# Altium PCB SnapItRev1.PcbDoc
Units mm, origin at the board's own origin, x right, y up, seen from the top; angles counter-clockwise.
Board outline 125 x 55.1 mm, 2 copper layers (Top Layer, Bottom Layer); 20 components, 47 nets, 115 pads, 11 vias.
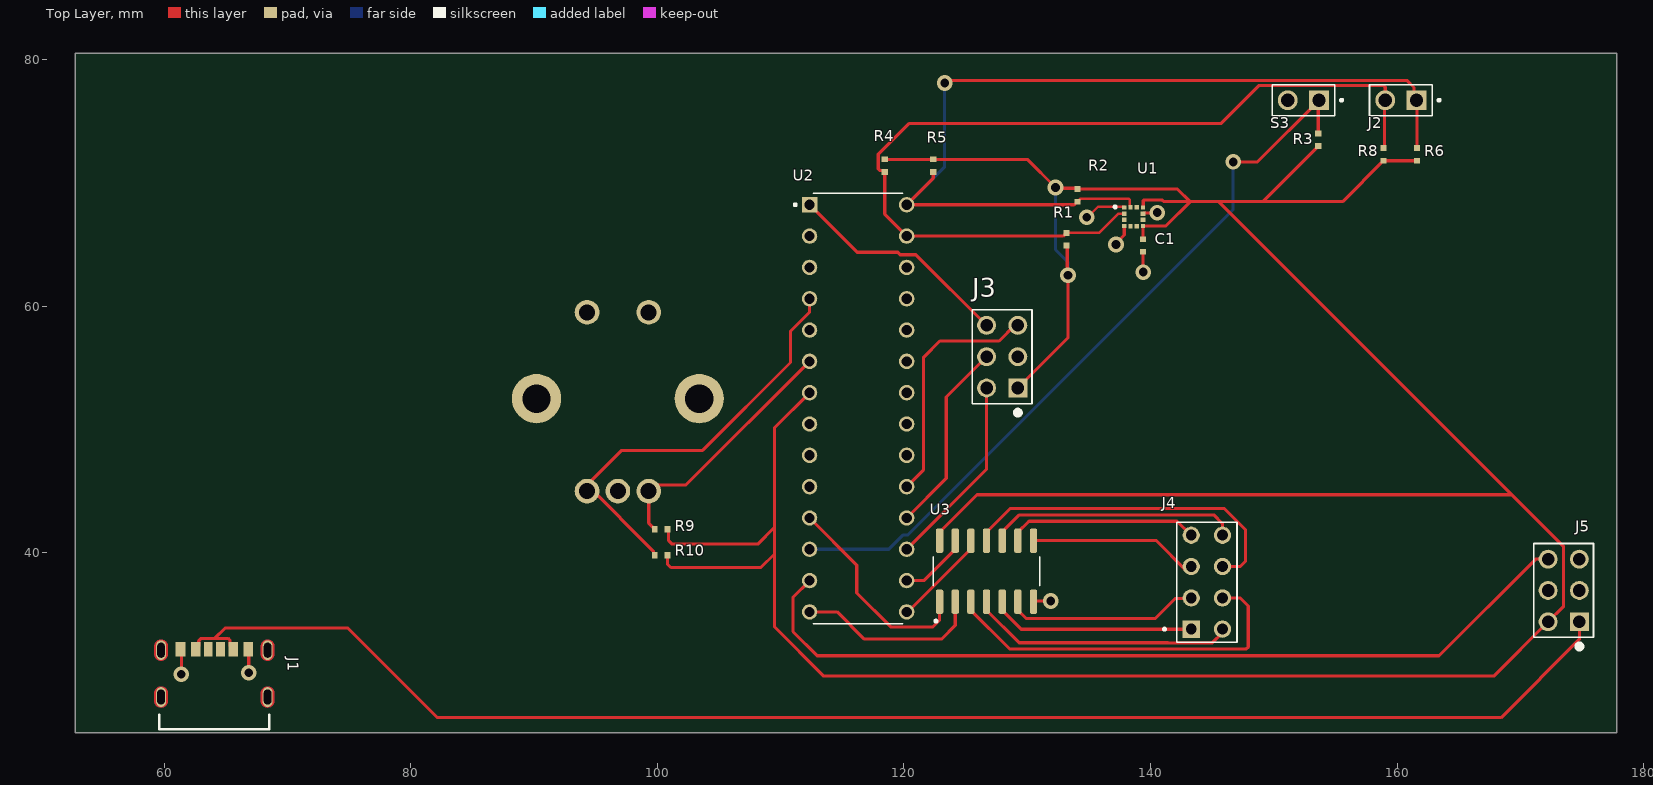
[diagram p0: Top Layer view]
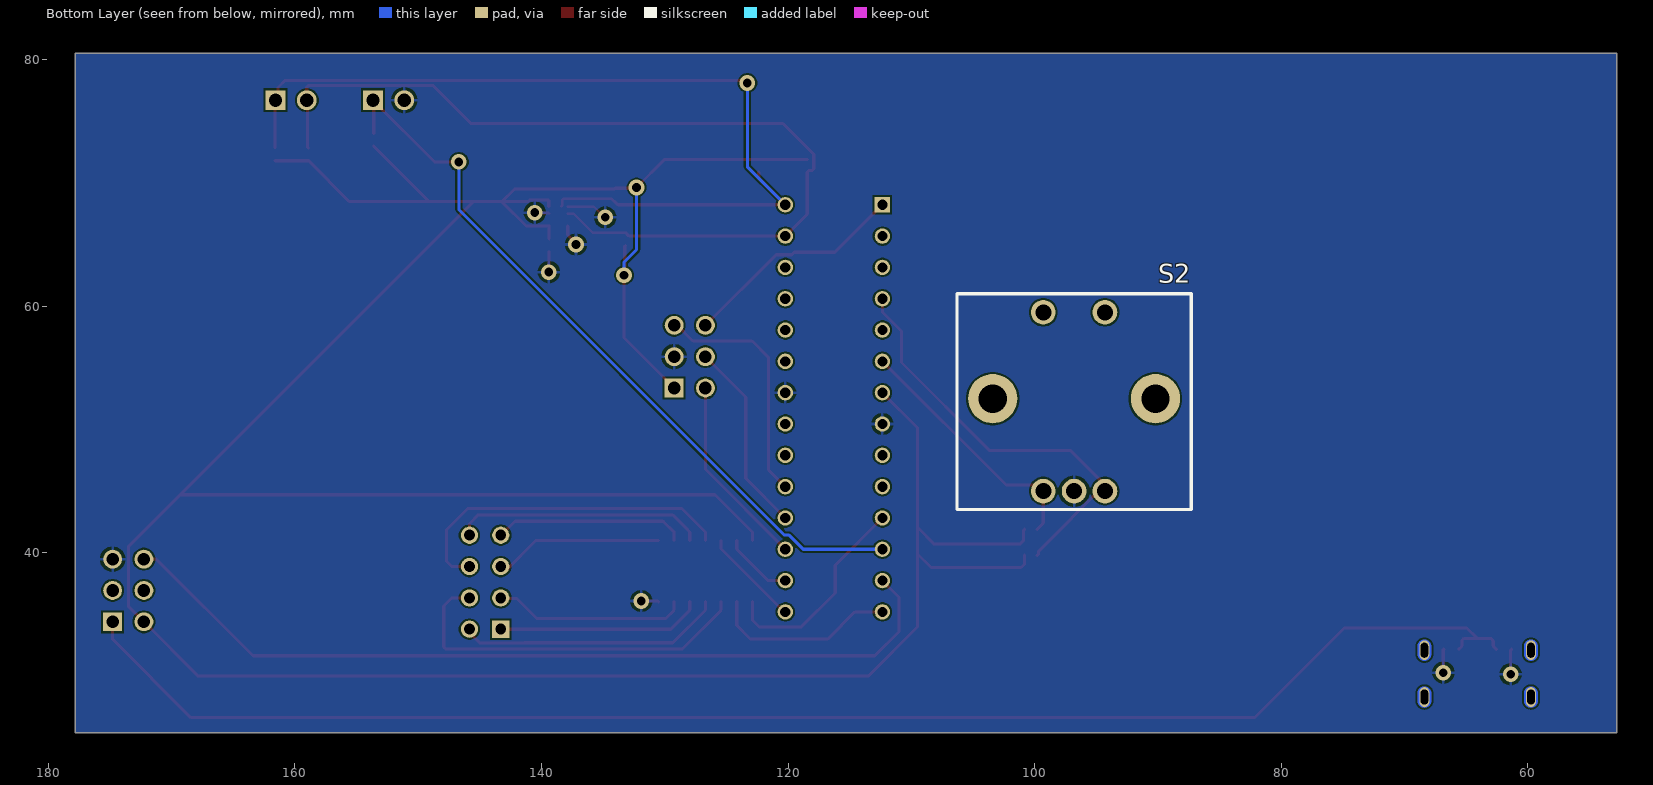
[diagram p1: Bottom Layer view, seen from below]
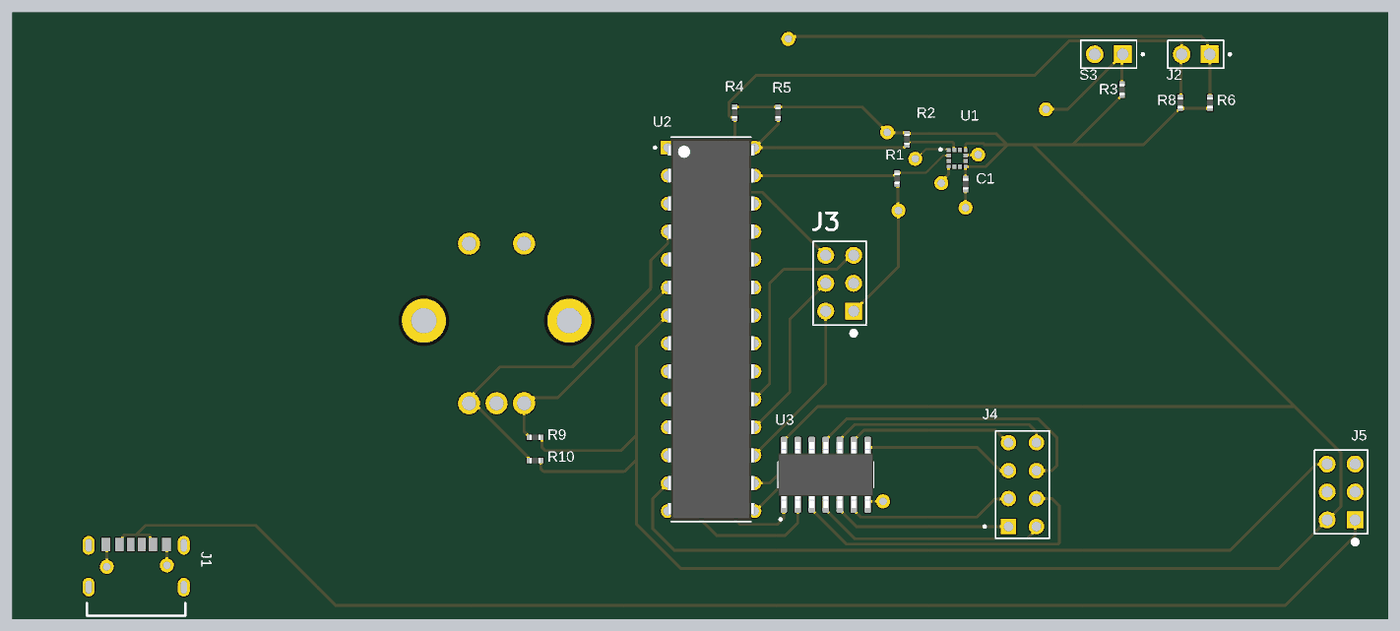
[diagram p2: 3D render of the assembled board from above, using the file's embedded part models]

## Layer stack, top to bottom
Top Solder: solder mask 0.0102, Solder Resist, Dk 3.5
Top Layer: signal copper 0.0356
Dielectric 1: dielectric 0.32, FR-4, Dk 4.8
Bottom Layer: signal copper 0.0356
Bottom Solder: solder mask 0.0102, Solder Resist, Dk 3.5

## Board outline
52.8,25.4 177.8,25.4 177.8,80.5 52.8,80.5

## Design rules (kind name [scope] priority, off if disabled: settings)
Clearance [All] p1: gap=0.15 ignorepadtopadclearanceinfootprint=FALSE except(0.2: Arc-Via Track-Via; 0.28: Arc-THPad Track-THPad)
MinimumSolderMaskSliver [All] p1 off: minsoldermaskwidth=0.254
PolygonConnect [All] p1: connectstyle=Relief reliefconductorwidth=0.254 reliefentries=4 polygonreliefangle="90 Angle" airgapwidth=0.254
RoutingVias [All] p1: holewidth=0.711 width=1.27 viastyle="Through Hole" minholewidth=0.711 minwidth=1.27 maxholewidth=0.711 maxwidth=1.27
SolderMaskExpansion [All] p1: expansion=0.102 istentingtop=FALSE
SupplyNets "Schematic Supply Nets" [InNet('GND')] p1: voltage=0.000
Width [All] p1: maxlimit=0.508 minlimit=0.15 preferedwidth=0.254
29 further rules are at their usual default settings.

## Components (designator, comment, footprint, x,y, rotation, side; value= is the part's Value field where it differs from the comment)
C1 "0.1u" 0402Basic 139.399,64.919 r270 top value=0.01uF
J1 "USBC" USBC 64.07,29.096 r0 top
J2 "2x1 Header" "2x1 Header" 160.3,76.7 r180 top
J3 "3x2 Header" "3x2 Header" 127.969,55.902 r90 top
J4 "4x2 Header" "4x2 Header" 144.57,37.61 r90 top
J5 "3x2 Header" "3x2 Header" 173.51,36.94 r90 top
R1 "4.7k" 0402Basic 133.176,65.427 r270 top
R2 "4.7k" 0402Basic 134.065,68.983 r90 top
R3 "1k" 0402Basic 153.6,73.488 r90 top
R4 "4.7k" 0402Basic 118.444,71.396 r90 top
R5 "4.7k" 0402Basic 122.381,71.396 r90 top
R6 "4.7k" 0402Basic 161.6,72.3 r90 top
R8 "4.7k" 0402Basic 158.9,72.3 r90 top
R9 "330" 0402Basic 100.3,41.9 r180 top
R10 "330" 0402Basic 100.3,39.8 r180 top
S2 "PEC12R-4225F-S0024" "Rotary Encoder" 99.3,45 r180 bottom
S3 "2x1 Header" "2x1 Header" 152.4,76.7 r180 top
U1 "MC3419" 12-VFLGA 138.5,67 r180 top (schematic designator U?)
U2 "ATMEGA328PU" ATMEGA328P 116.285,51.711 r0 top
U3 "74HC393D,653" "SOIC14 3.9mm" 126.699,38.503 r90 top

## Footprints (in the part's own frame and the unit in brackets; to place one, negate y for a bottom-side part, rotate by r counter-clockwise, add the part's x,y. Pads: shape width x height; smd on the part's side, far side on the other; paste and mask are expansions set on the pad)
"2x1 Header" [mm]
  rect 1.605x1.605 / inner round 1.605 / far side rect 1.605x1.605 hole 1.07: 1(-1.27,0)
  round 1.605 hole 1.07: 2(1.27,0)
  silkscreen extent -3.2,-1.27 2.54,1.27
"3x2 Header" [mm]
  rect 1.53x1.53 hole 1.02: 1(-2.54,-1.27)
  round 1.53 hole 1.02: 2(-2.54,1.27) 3(0,-1.27) 4(0,1.27) 5(2.54,-1.27) 6(2.54,1.27)
  silkscreen extent -4.74,-2.41 3.81,2.41
"4x2 Header" [mm]
  rect 1.398x1.398 hole 0.89: 1(-3.81,1.27)
  round 1.398 hole 0.89: 2(-1.27,1.27) 3(1.27,1.27) 4(3.81,1.27) 5(-3.81,-1.27) 6(-1.27,-1.27) 7(1.27,-1.27) 8(3.81,-1.27)
  silkscreen extent -4.88,-2.44 4.88,3.54
12-VFLGA [mm]
  rect 0.345x0.345 smd: 1(0.635,-1) 4(0.635,0.5) 7(-0.895,0.5) 10(-0.895,-1)
  rect 0.39x0.345 smd: 2(0.635,-0.5) 3(0.635,0) 8(-0.895,0) 9(-0.895,-0.5)
  rect 0.345x0.39 smd: 5(0.12,0.515) 6(-0.38,0.515) 11(-0.38,-1.015) 12(0.12,-1.015)
  silkscreen extent 1.27,-1.15 1.47,-0.95
0402Basic [mm]
  rect 0.475x0.5 smd: 1(-0.512,0) 2(0.512,0)
  body extent -0.5,-0.25 0.5,0.25, height 0.35
ATMEGA328P [mm]
  rect 1.25x1.25 / inner round 1.25 / far side rect 1.25x1.25 hole 0.83: 1(-3.937,16.51)
  round 1.25 hole 0.83: 2(-3.937,13.97) 3(-3.937,11.43) 4(-3.937,8.89) 5(-3.937,6.35) 6(-3.937,3.81) 7(-3.937,1.27) 8(-3.937,-1.27) 9(-3.937,-3.81) 10(-3.937,-6.35) 11(-3.937,-8.89) 12(-3.937,-11.43) 13(-3.937,-13.97) 14(-3.937,-16.51) 15(3.937,-16.51) 16(3.937,-13.97) 17(3.937,-11.43) 18(3.937,-8.89) 19(3.937,-6.35) 20(3.937,-3.81) 21(3.937,-1.27) 22(3.937,1.27) 23(3.937,3.81) 24(3.937,6.35) 25(3.937,8.89) 26(3.937,11.43) 27(3.937,13.97) 28(3.937,16.51)
  silkscreen extent -5.2,-17.45 3.62,17.45, body extent -3.95,-17.34 3.95,17.34, height 4.57
"Rotary Encoder" [mm]
  round 2 hole 1.3: 1(0,0) 2(2.5,0) 3(5,0) 6(0,14.5) 7(5,14.5)
  round 4 hole 2.3 mask+0.3: 4(-4.1,7.5) 5(9.1,7.5)
  silkscreen extent -7,-1.5 12,16
"SOIC14 3.9mm" [mm]
  rrect50% 1.97x0.6 smd: 1(-2.475,3.81) 2(-2.475,2.54) 3(-2.475,1.27) 4(-2.475,0) 5(-2.475,-1.27) 6(-2.475,-2.54) 7(-2.475,-3.81) 8(2.475,-3.81) 9(2.475,-2.54) 10(2.475,-1.27) 11(2.475,0) 12(2.475,1.27) 13(2.475,2.54) 14(2.475,3.81)
  silkscreen extent -4.15,-4.33 1.17,4.33, body extent -3,-4.33 3,4.33, height 1.75
USBC [mm]
  rect 0.7x1.2 smd: A5(-0.5,3.08) B5(0.5,3.08)
  rect 0.76x1.2 smd: A9(1.52,3.08) B9(-1.52,3.08)
  rect 0.8x1.2 smd: A12(2.75,3.08) B12(-2.75,3.08)
  oval 0.8x1.6 hole 0.6 slot 1.2 at 90 deg mask+0: S1(-4.32,3) S2(4.32,3) S3(-4.32,-0.8) S4(4.32,-0.8)
  Top Layer region: -4.291,0.049 -4.263,0.047 -4.234,0.043 -4.206,0.038 -4.178,0.031 -4.15,0.023 -4.123,0.013 -4.096,0.002 -4.07,-0.01 -4.045,-0.024 -4.02,-0.039 -3.997,-0.055 -3.974,-0.073 -3.952,-0.091 -3.931,-0.111 -3.911,-0.132 -3.893,-0.154 -3.875,-0.177 -3.859,-0.2 -3.844,-0.225 -3.83,-0.25 -3.818,-0.276 -3.807,-0.303 -3.797,-0.33 -3.789,-0.358 -3.782,-0.386 -3.777,-0.414 -3.773,-0.443 -3.771,-0.471 -3.77,-0.5 -3.77,-1.1 -3.771,-1.129 -3.773,-1.157 -3.777,-1.186 -3.782,-1.214 -3.789,-1.242 -3.797,-1.27 -3.807,-1.297 -3.818,-1.324 -3.83,-1.35 -3.844,-1.375 -3.859,-1.4 -3.875,-1.423 -3.893,-1.446 -3.911,-1.468 -3.931,-1.489 -3.952,-1.509 -3.974,-1.527 -3.997,-1.545 -4.02,-1.561 -4.045,-1.576 -4.07,-1.59 -4.096,-1.602 -4.123,-1.613 -4.15,-1.623 -4.178,-1.631 -4.206,-1.638 -4.234,-1.643 -4.263,-1.647 -4.291,-1.649 -4.32,-1.65 -4.349,-1.649 -4.377,-1.647 -4.406,-1.643 -4.434,-1.638 -4.462,-1.631 -4.49,-1.623 -4.517,-1.613 -4.544,-1.602 -4.57,-1.59 -4.595,-1.576 -4.62,-1.561 -4.643,-1.545 -4.666,-1.527 -4.688,-1.509 -4.709,-1.489 -4.729,-1.468 -4.747,-1.446 -4.765,-1.423 -4.781,-1.4 -4.796,-1.375 -4.81,-1.35 -4.822,-1.324 -4.833,-1.297 -4.843,-1.27 -4.851,-1.242 -4.858,-1.214 -4.863,-1.186 -4.867,-1.157 -4.869,-1.129 -4.87,-1.1 -4.87,-0.5 -4.869,-0.471 -4.867,-0.443 -4.863,-0.414 -4.858,-0.386 -4.851,-0.358 -4.843,-0.33 -4.833,-0.303 -4.822,-0.276 -4.81,-0.25 -4.796,-0.225 -4.781,-0.2 -4.765,-0.177 -4.747,-0.154 -4.729,-0.132 -4.709,-0.111 -4.688,-0.091 -4.666,-0.073 -4.643,-0.055 -4.62,-0.039 -4.595,-0.024 -4.57,-0.01 -4.544,0.002 -4.517,0.013 -4.49,0.023 -4.462,0.031 -4.434,0.038 -4.406,0.043 -4.377,0.047 -4.349,0.049 -4.32,0.05
  Top Layer region: 4.349,0.049 4.377,0.047 4.406,0.043 4.434,0.038 4.462,0.031 4.49,0.023 4.517,0.013 4.544,0.002 4.57,-0.01 4.595,-0.024 4.62,-0.039 4.643,-0.055 4.666,-0.073 4.688,-0.091 4.709,-0.111 4.729,-0.132 4.747,-0.154 4.765,-0.177 4.781,-0.2 4.796,-0.225 4.81,-0.25 4.822,-0.276 4.833,-0.303 4.843,-0.33 4.851,-0.358 4.858,-0.386 4.863,-0.414 4.867,-0.443 4.869,-0.471 4.87,-0.5 4.87,-1.1 4.869,-1.129 4.867,-1.157 4.863,-1.186 4.858,-1.214 4.851,-1.242 4.843,-1.27 4.833,-1.297 4.822,-1.324 4.81,-1.35 4.796,-1.375 4.781,-1.4 4.765,-1.423 4.747,-1.446 4.729,-1.468 4.709,-1.489 4.688,-1.509 4.666,-1.527 4.643,-1.545 4.62,-1.561 4.595,-1.576 4.57,-1.59 4.544,-1.602 4.517,-1.613 4.49,-1.623 4.462,-1.631 4.434,-1.638 4.406,-1.643 4.377,-1.647 4.349,-1.649 4.32,-1.65 4.291,-1.649 4.263,-1.647 4.234,-1.643 4.206,-1.638 4.178,-1.631 4.15,-1.623 4.123,-1.613 4.096,-1.602 4.07,-1.59 4.045,-1.576 4.02,-1.561 3.997,-1.545 3.974,-1.527 3.952,-1.509 3.931,-1.489 3.911,-1.468 3.893,-1.446 3.875,-1.423 3.859,-1.4 3.844,-1.375 3.83,-1.35 3.818,-1.324 3.807,-1.297 3.797,-1.27 3.789,-1.242 3.782,-1.214 3.777,-1.186 3.773,-1.157 3.771,-1.129 3.77,-1.1 3.77,-0.5 3.771,-0.471 3.773,-0.443 3.777,-0.414 3.782,-0.386 3.789,-0.358 3.797,-0.33 3.807,-0.303 3.818,-0.276 3.83,-0.25 3.844,-0.225 3.859,-0.2 3.875,-0.177 3.893,-0.154 3.911,-0.132 3.931,-0.111 3.952,-0.091 3.974,-0.073 3.997,-0.055 4.02,-0.039 4.045,-0.024 4.07,-0.01 4.096,0.002 4.123,0.013 4.15,0.023 4.178,0.031 4.206,0.038 4.234,0.043 4.263,0.047 4.291,0.049 4.32,0.05
  Top Layer region: -4.291,3.849 -4.263,3.847 -4.234,3.843 -4.206,3.838 -4.178,3.831 -4.15,3.823 -4.123,3.813 -4.096,3.802 -4.07,3.79 -4.045,3.776 -4.02,3.761 -3.997,3.745 -3.974,3.727 -3.952,3.709 -3.931,3.689 -3.911,3.668 -3.893,3.646 -3.875,3.623 -3.859,3.6 -3.844,3.575 -3.83,3.55 -3.818,3.524 -3.807,3.497 -3.797,3.47 -3.789,3.442 -3.782,3.414 -3.777,3.386 -3.773,3.357 -3.771,3.329 -3.77,3.3 -3.77,2.7 -3.771,2.671 -3.773,2.643 -3.777,2.614 -3.782,2.586 -3.789,2.558 -3.797,2.53 -3.807,2.503 -3.818,2.476 -3.83,2.45 -3.844,2.425 -3.859,2.4 -3.875,2.377 -3.893,2.354 -3.911,2.332 -3.931,2.311 -3.952,2.291 -3.974,2.273 -3.997,2.255 -4.02,2.239 -4.045,2.224 -4.07,2.21 -4.096,2.198 -4.123,2.187 -4.15,2.177 -4.178,2.169 -4.206,2.162 -4.234,2.157 -4.263,2.153 -4.291,2.151 -4.32,2.15 -4.349,2.151 -4.377,2.153 -4.406,2.157 -4.434,2.162 -4.462,2.169 -4.49,2.177 -4.517,2.187 -4.544,2.198 -4.57,2.21 -4.595,2.224 -4.62,2.239 -4.643,2.255 -4.666,2.273 -4.688,2.291 -4.709,2.311 -4.729,2.332 -4.747,2.354 -4.765,2.377 -4.781,2.4 -4.796,2.425 -4.81,2.45 -4.822,2.476 -4.833,2.503 -4.843,2.53 -4.851,2.558 -4.858,2.586 -4.863,2.614 -4.867,2.643 -4.869,2.671 -4.87,2.7 -4.87,3.3 -4.869,3.329 -4.867,3.357 -4.863,3.386 -4.858,3.414 -4.851,3.442 -4.843,3.47 -4.833,3.497 -4.822,3.524 -4.81,3.55 -4.796,3.575 -4.781,3.6 -4.765,3.623 -4.747,3.646 -4.729,3.668 -4.709,3.689 -4.688,3.709 -4.666,3.727 -4.643,3.745 -4.62,3.761 -4.595,3.776 -4.57,3.79 -4.544,3.802 -4.517,3.813 -4.49,3.823 -4.462,3.831 -4.434,3.838 -4.406,3.843 -4.377,3.847 -4.349,3.849 -4.32,3.85
  Top Layer region: 4.349,3.849 4.377,3.847 4.406,3.843 4.434,3.838 4.462,3.831 4.49,3.823 4.517,3.813 4.544,3.802 4.57,3.79 4.595,3.776 4.62,3.761 4.643,3.745 4.666,3.727 4.688,3.709 4.709,3.689 4.729,3.668 4.747,3.646 4.765,3.623 4.781,3.6 4.796,3.575 4.81,3.55 4.822,3.524 4.833,3.497 4.843,3.47 4.851,3.442 4.858,3.414 4.863,3.386 4.867,3.357 4.869,3.329 4.87,3.3 4.87,2.7 4.869,2.671 4.867,2.643 4.863,2.614 4.858,2.586 4.851,2.558 4.843,2.53 4.833,2.503 4.822,2.476 4.81,2.45 4.796,2.425 4.781,2.4 4.765,2.377 4.747,2.354 4.729,2.332 4.709,2.311 4.688,2.291 4.666,2.273 4.643,2.255 4.62,2.239 4.595,2.224 4.57,2.21 4.544,2.198 4.517,2.187 4.49,2.177 4.462,2.169 4.434,2.162 4.406,2.157 4.377,2.153 4.349,2.151 4.32,2.15 4.291,2.151 4.263,2.153 4.234,2.157 4.206,2.162 4.178,2.169 4.15,2.177 4.123,2.187 4.096,2.198 4.07,2.21 4.045,2.224 4.02,2.239 3.997,2.255 3.974,2.273 3.952,2.291 3.931,2.311 3.911,2.332 3.893,2.354 3.875,2.377 3.859,2.4 3.844,2.425 3.83,2.45 3.818,2.476 3.807,2.503 3.797,2.53 3.789,2.558 3.782,2.586 3.777,2.614 3.773,2.643 3.771,2.671 3.77,2.7 3.77,3.3 3.771,3.329 3.773,3.357 3.777,3.386 3.782,3.414 3.789,3.442 3.797,3.47 3.807,3.497 3.818,3.524 3.83,3.55 3.844,3.575 3.859,3.6 3.875,3.623 3.893,3.646 3.911,3.668 3.931,3.689 3.952,3.709 3.974,3.727 3.997,3.745 4.02,3.761 4.045,3.776 4.07,3.79 4.096,3.802 4.123,3.813 4.15,3.823 4.178,3.831 4.206,3.838 4.234,3.843 4.263,3.847 4.291,3.849 4.32,3.85
  Bottom Layer region: -4.291,0.049 -4.263,0.047 -4.234,0.043 -4.206,0.038 -4.178,0.031 -4.15,0.023 -4.123,0.013 -4.096,0.002 -4.07,-0.01 -4.045,-0.024 -4.02,-0.039 -3.997,-0.055 -3.974,-0.073 -3.952,-0.091 -3.931,-0.111 -3.911,-0.132 -3.893,-0.154 -3.875,-0.177 -3.859,-0.2 -3.844,-0.225 -3.83,-0.25 -3.818,-0.276 -3.807,-0.303 -3.797,-0.33 -3.789,-0.358 -3.782,-0.386 -3.777,-0.414 -3.773,-0.443 -3.771,-0.471 -3.77,-0.5 -3.77,-1.1 -3.771,-1.129 -3.773,-1.157 -3.777,-1.186 -3.782,-1.214 -3.789,-1.242 -3.797,-1.27 -3.807,-1.297 -3.818,-1.324 -3.83,-1.35 -3.844,-1.375 -3.859,-1.4 -3.875,-1.423 -3.893,-1.446 -3.911,-1.468 -3.931,-1.489 -3.952,-1.509 -3.974,-1.527 -3.997,-1.545 -4.02,-1.561 -4.045,-1.576 -4.07,-1.59 -4.096,-1.602 -4.123,-1.613 -4.15,-1.623 -4.178,-1.631 -4.206,-1.638 -4.234,-1.643 -4.263,-1.647 -4.291,-1.649 -4.32,-1.65 -4.349,-1.649 -4.377,-1.647 -4.406,-1.643 -4.434,-1.638 -4.462,-1.631 -4.49,-1.623 -4.517,-1.613 -4.544,-1.602 -4.57,-1.59 -4.595,-1.576 -4.62,-1.561 -4.643,-1.545 -4.666,-1.527 -4.688,-1.509 -4.709,-1.489 -4.729,-1.468 -4.747,-1.446 -4.765,-1.423 -4.781,-1.4 -4.796,-1.375 -4.81,-1.35 -4.822,-1.324 -4.833,-1.297 -4.843,-1.27 -4.851,-1.242 -4.858,-1.214 -4.863,-1.186 -4.867,-1.157 -4.869,-1.129 -4.87,-1.1 -4.87,-0.5 -4.869,-0.471 -4.867,-0.443 -4.863,-0.414 -4.858,-0.386 -4.851,-0.358 -4.843,-0.33 -4.833,-0.303 -4.822,-0.276 -4.81,-0.25 -4.796,-0.225 -4.781,-0.2 -4.765,-0.177 -4.747,-0.154 -4.729,-0.132 -4.709,-0.111 -4.688,-0.091 -4.666,-0.073 -4.643,-0.055 -4.62,-0.039 -4.595,-0.024 -4.57,-0.01 -4.544,0.002 -4.517,0.013 -4.49,0.023 -4.462,0.031 -4.434,0.038 -4.406,0.043 -4.377,0.047 -4.349,0.049 -4.32,0.05
  Bottom Layer region: 4.349,0.049 4.377,0.047 4.406,0.043 4.434,0.038 4.462,0.031 4.49,0.023 4.517,0.013 4.544,0.002 4.57,-0.01 4.595,-0.024 4.62,-0.039 4.643,-0.055 4.666,-0.073 4.688,-0.091 4.709,-0.111 4.729,-0.132 4.747,-0.154 4.765,-0.177 4.781,-0.2 4.796,-0.225 4.81,-0.25 4.822,-0.276 4.833,-0.303 4.843,-0.33 4.851,-0.358 4.858,-0.386 4.863,-0.414 4.867,-0.443 4.869,-0.471 4.87,-0.5 4.87,-1.1 4.869,-1.129 4.867,-1.157 4.863,-1.186 4.858,-1.214 4.851,-1.242 4.843,-1.27 4.833,-1.297 4.822,-1.324 4.81,-1.35 4.796,-1.375 4.781,-1.4 4.765,-1.423 4.747,-1.446 4.729,-1.468 4.709,-1.489 4.688,-1.509 4.666,-1.527 4.643,-1.545 4.62,-1.561 4.595,-1.576 4.57,-1.59 4.544,-1.602 4.517,-1.613 4.49,-1.623 4.462,-1.631 4.434,-1.638 4.406,-1.643 4.377,-1.647 4.349,-1.649 4.32,-1.65 4.291,-1.649 4.263,-1.647 4.234,-1.643 4.206,-1.638 4.178,-1.631 4.15,-1.623 4.123,-1.613 4.096,-1.602 4.07,-1.59 4.045,-1.576 4.02,-1.561 3.997,-1.545 3.974,-1.527 3.952,-1.509 3.931,-1.489 3.911,-1.468 3.893,-1.446 3.875,-1.423 3.859,-1.4 3.844,-1.375 3.83,-1.35 3.818,-1.324 3.807,-1.297 3.797,-1.27 3.789,-1.242 3.782,-1.214 3.777,-1.186 3.773,-1.157 3.771,-1.129 3.77,-1.1 3.77,-0.5 3.771,-0.471 3.773,-0.443 3.777,-0.414 3.782,-0.386 3.789,-0.358 3.797,-0.33 3.807,-0.303 3.818,-0.276 3.83,-0.25 3.844,-0.225 3.859,-0.2 3.875,-0.177 3.893,-0.154 3.911,-0.132 3.931,-0.111 3.952,-0.091 3.974,-0.073 3.997,-0.055 4.02,-0.039 4.045,-0.024 4.07,-0.01 4.096,0.002 4.123,0.013 4.15,0.023 4.178,0.031 4.206,0.038 4.234,0.043 4.263,0.047 4.291,0.049 4.32,0.05
  Bottom Layer region: -4.291,3.849 -4.263,3.847 -4.234,3.843 -4.206,3.838 -4.178,3.831 -4.15,3.823 -4.123,3.813 -4.096,3.802 -4.07,3.79 -4.045,3.776 -4.02,3.761 -3.997,3.745 -3.974,3.727 -3.952,3.709 -3.931,3.689 -3.911,3.668 -3.893,3.646 -3.875,3.623 -3.859,3.6 -3.844,3.575 -3.83,3.55 -3.818,3.524 -3.807,3.497 -3.797,3.47 -3.789,3.442 -3.782,3.414 -3.777,3.386 -3.773,3.357 -3.771,3.329 -3.77,3.3 -3.77,2.7 -3.771,2.671 -3.773,2.643 -3.777,2.614 -3.782,2.586 -3.789,2.558 -3.797,2.53 -3.807,2.503 -3.818,2.476 -3.83,2.45 -3.844,2.425 -3.859,2.4 -3.875,2.377 -3.893,2.354 -3.911,2.332 -3.931,2.311 -3.952,2.291 -3.974,2.273 -3.997,2.255 -4.02,2.239 -4.045,2.224 -4.07,2.21 -4.096,2.198 -4.123,2.187 -4.15,2.177 -4.178,2.169 -4.206,2.162 -4.234,2.157 -4.263,2.153 -4.291,2.151 -4.32,2.15 -4.349,2.151 -4.377,2.153 -4.406,2.157 -4.434,2.162 -4.462,2.169 -4.49,2.177 -4.517,2.187 -4.544,2.198 -4.57,2.21 -4.595,2.224 -4.62,2.239 -4.643,2.255 -4.666,2.273 -4.688,2.291 -4.709,2.311 -4.729,2.332 -4.747,2.354 -4.765,2.377 -4.781,2.4 -4.796,2.425 -4.81,2.45 -4.822,2.476 -4.833,2.503 -4.843,2.53 -4.851,2.558 -4.858,2.586 -4.863,2.614 -4.867,2.643 -4.869,2.671 -4.87,2.7 -4.87,3.3 -4.869,3.329 -4.867,3.357 -4.863,3.386 -4.858,3.414 -4.851,3.442 -4.843,3.47 -4.833,3.497 -4.822,3.524 -4.81,3.55 -4.796,3.575 -4.781,3.6 -4.765,3.623 -4.747,3.646 -4.729,3.668 -4.709,3.689 -4.688,3.709 -4.666,3.727 -4.643,3.745 -4.62,3.761 -4.595,3.776 -4.57,3.79 -4.544,3.802 -4.517,3.813 -4.49,3.823 -4.462,3.831 -4.434,3.838 -4.406,3.843 -4.377,3.847 -4.349,3.849 -4.32,3.85
  Bottom Layer region: 4.349,3.849 4.377,3.847 4.406,3.843 4.434,3.838 4.462,3.831 4.49,3.823 4.517,3.813 4.544,3.802 4.57,3.79 4.595,3.776 4.62,3.761 4.643,3.745 4.666,3.727 4.688,3.709 4.709,3.689 4.729,3.668 4.747,3.646 4.765,3.623 4.781,3.6 4.796,3.575 4.81,3.55 4.822,3.524 4.833,3.497 4.843,3.47 4.851,3.442 4.858,3.414 4.863,3.386 4.867,3.357 4.869,3.329 4.87,3.3 4.87,2.7 4.869,2.671 4.867,2.643 4.863,2.614 4.858,2.586 4.851,2.558 4.843,2.53 4.833,2.503 4.822,2.476 4.81,2.45 4.796,2.425 4.781,2.4 4.765,2.377 4.747,2.354 4.729,2.332 4.709,2.311 4.688,2.291 4.666,2.273 4.643,2.255 4.62,2.239 4.595,2.224 4.57,2.21 4.544,2.198 4.517,2.187 4.49,2.177 4.462,2.169 4.434,2.162 4.406,2.157 4.377,2.153 4.349,2.151 4.32,2.15 4.291,2.151 4.263,2.153 4.234,2.157 4.206,2.162 4.178,2.169 4.15,2.177 4.123,2.187 4.096,2.198 4.07,2.21 4.045,2.224 4.02,2.239 3.997,2.255 3.974,2.273 3.952,2.291 3.931,2.311 3.911,2.332 3.893,2.354 3.875,2.377 3.859,2.4 3.844,2.425 3.83,2.45 3.818,2.476 3.807,2.503 3.797,2.53 3.789,2.558 3.782,2.586 3.777,2.614 3.773,2.643 3.771,2.671 3.77,2.7 3.77,3.3 3.771,3.329 3.773,3.357 3.777,3.386 3.782,3.414 3.789,3.442 3.797,3.47 3.807,3.497 3.818,3.524 3.83,3.55 3.844,3.575 3.859,3.6 3.875,3.623 3.893,3.646 3.911,3.668 3.931,3.689 3.952,3.709 3.974,3.727 3.997,3.745 4.02,3.761 4.045,3.776 4.07,3.79 4.096,3.802 4.123,3.813 4.15,3.823 4.178,3.831 4.206,3.838 4.234,3.843 4.263,3.847 4.291,3.849 4.32,3.85
  silkscreen extent -4.47,-3.4 4.47,-2.25

## Part data
C1: library part CAP
R1 R2 R3 R4 R5 R6 R8 R9 R10: library part RES
S2: "ROTARY ENCODER MECHANICAL 24PPR"
U1: "3-AXIS ACCELEROMETER"
U3: "4 bit Counter"

## Via types
v1: diameter 1.27, hole 0.711, Top Layer to Bottom Layer, 11 vias

## Nets (pads, with @x,y where several pads share a name; then routed paths per layer and width w, separated by ;. In a path a pad name is that pad's centre, name@x,y a point inside that pad or via, vN(x,y) a via of type N, cw(c..) or ccw(c..) an arc to the next point about the centre after c; other vN are vias at no path point)
1a: 
1b: 
1c: 
1d: 
1e: 
1f: 
1g: 
1qa: 
1qb: 
1qc: 
1qd: 
2a: 
2b: 
2c: 
2d: 
2e: 
2f: 
2g: 
2qa: 
2qb: 
2qc: 
2qd: 
5Vin: J1.A9 J1.B9 J5.1 | length 122.4
  Top Layer w0.254: J1.B9 62.803,32.429 62.803,32.851 63.005,33.053 64.097,33.053 ; J1.A9 65.337,32.429 65.337,32.905 65.188,33.053 64.097,33.053 ; J5.1 174.78,32.98 168.43,26.63 82.17,26.63 74.9,33.9 64.943,33.9 64.097,33.053
GameButton: R3.2 S3.1 U2.12 | length 61.4
  Top Layer w0.254: v1(146.7,71.7) 148.67,71.7 S3.1 153.6,76.63 R3.2
  Bottom Layer w0.254: U2.12 118.762,40.281 119.914,41.433 120.293,41.433 146.7,67.84 v1(146.7,71.7)
GND: C1.2 J1.A12 J1.B12 J3.3 J5.5 S2.2 S3.2 U1.1 U1.4 U1.9 U2.8 U2.22 U3.7 | length 13.4
  Top Layer w0.203: v1(134.827,67.205) 134.887,67.205 135.76,68.078 U1.1@137.875,68.078
  Top Layer w0.254: J1.B12 61.395,32.101 v1(61.395,30.144) ; J1.A12 66.856,32.14 v1(66.856,30.271) ; U3.7 130.571,36.09 v1(131.906,36.09) ; v1(137.2,65) 137.2,65.107 137.865,65.772 U1.4 ; U1.9 139.438,67.543 140.499,67.543 v1(140.542,67.586) ; v1(139.399,62.76) C1.2
IntoButton: J5.6 U2.13 | length 70
  Top Layer w0.254: U2.13 111,36.393 111,33.6 112.955,31.645 163.395,31.645 171.23,39.48 J5.6
MISO: J3.4 U2.18 | length 15.8
  Top Layer w0.254: U2.18 123.434,46.033 123.434,52.637 J3.4
MOSI: J3.2 U2.17 | length 15.8
  Top Layer w0.254: U2.17 126.699,46.758 J3.2
NetJ4_1: J4.1 U3.5 | length 16.7
  Top Layer w0.254: U3.5 127.969,35.343 129.512,33.8 J4.1
NetJ4_2: J4.2 U3.6 | length 15.5
  Top Layer w0.254: U3.6 129.239,35.343 129.92,34.662 140.384,34.662 142.022,36.3 J4.2@143.1,36.3
NetJ4_3: J4.3 U3.8 | length 13.3
  Top Layer w0.254: U3.8 140.48,40.978 J4.3@142.829,38.629
NetJ4_4: J4.4 U3.9 | length 15.6
  Top Layer w0.254: U3.9 129.239,41.663 130.101,42.526 130.132,42.557 142.146,42.557 J4.4@143.328,41.375
NetJ4_5: J4.5 U3.4 | length 21.5
  Top Layer w0.254: U3.4 126.699,35.343 129.342,32.7 141.426,32.7 141.432,32.694 145.017,32.694 145.84,33.517 J4.5
NetJ4_6: J4.6 U3.3 | length 30.3
  Top Layer w0.254: U3.3 125.429,35.343 128.498,32.274 128.572,32.2 147.774,32.2 147.922,32.349 147.922,35.678 147.26,36.34 J4.6 ; J4.6@145.84,36.393 J4.6@145.877,36.393
NetJ4_7: J4.7 U3.11 | length 27.8
  Top Layer w0.254: U3.11 126.699,41.663 128.619,43.583 145.977,43.583 147.7,41.861 147.7,39.3 147.28,38.88 J4.7
NetJ4_8: J4.8 U3.10 | length 20.4
  Top Layer w0.254: U3.10 127.969,41.676 128.142,41.849 128.142,41.851 129.366,43.075 145.125,43.075 145.84,42.36 J4.8
OnesInc: U2.11 U3.1 | length 17.3
  Top Layer w0.254: U2.11 116.172,38.997 116.172,36.737 118.92,33.988 122.359,33.988 122.889,34.518 U3.1
OnesReset: U2.14 U3.2 | length 15.1
  Top Layer w0.254: U2.14 114.583,35.201 116.793,32.991 123.041,32.991 124.159,34.109 U3.2
OutA: R9.2 S2.1 U2.6 | length 21
  Top Layer w0.254: R9.2 99.788,41.912 99.3,42.401 99.3,45.5 102.327,45.5 U2.6
OutB: R10.2 S2.3 U2.4 | length 34.4
  Top Layer w0.254: R10.2 99.677,39.91 99.677,40.122 94.3,45.5 97.1,48.3 103.675,48.3 110.8,55.425 110.8,57.973 112.348,59.521 U2.4
RST: J3.6 U2.1 | length 18.4
  Top Layer w0.254: U2.1 116.201,64.368 119.504,64.368 119.699,64.173 120.968,64.173 J3.6
SCK: J3.5 U2.19 | length 19.8
  Top Layer w0.254: U2.19 121.598,46.737 121.598,55.86 122.911,57.172 127.715,57.172 128.985,58.442 J3.5
SCL: J2.1 R2.1 R5.1 R6.2 U1.12 U2.28 | length 77.1
  Top Layer w0.203: R2.1@134.077,68.471 134.213,68.607 134.213,68.61 134.332,68.729 138.202,68.729 138.321,68.61 138.321,68.162 U1.12@138.39,68.093
  Top Layer w0.254: R5.1 122.381,70.38 U2.28 133.802,68.221 134.052,68.471 R2.1 ; v1(123.3,78.1) 123.399,78.199 123.399,78.313 160.787,78.313 161.365,77.735 161.365,76.905 161.6,76.67 R6.2
  Bottom Layer w0.254: U2.28 123.3,71.299 v1(123.3,78.1)
SDA: J2.2 R1.1 R4.1 R8.2 U1.2 U2.27 | length 74.6
  Top Layer w0.203: R1.1@133.176,65.935 135.823,65.935 137.388,67.5 U1.2
  Top Layer w0.254: R1.1 133.163,65.939 132.905,65.681 U2.27 118.444,67.459 R4.1 118.333,70.995 118.066,70.995 117.917,71.143 117.917,72.317 120.4,74.8 145.7,74.8 148.809,77.909 158.881,77.909 159.03,77.761 J2.2 158.965,76.635 158.965,72.877 R8.2
TensInc: U2.16 U3.13 | length 5.7
  Top Layer w0.254: U2.16 121.607,37.741 124.159,40.293 U3.13
TensReset: U2.15 U3.12 | length 8
  Top Layer w0.254: U2.15 120.324,35.201 125.429,40.306 U3.12
VDD: C1.1 J3.1 J5.2 R1.2 R2.2 R3.1 R4.2 R5.2 R6.1 R8.1 R9.1 R10.1 U1.7 U1.10 U2.7 U3.14 | length 284.4
  Top Layer w0.254: R10.1 100.812,39.088 101.1,38.8 108.4,38.8 109.5,39.9 ; R9.1 100.915,41.797 100.915,40.985 101.2,40.7 108.141,40.7 109.5,42.059 ; U2.7 109.5,50.133 109.5,42.059 ; R4.2 R5.2 ; R5.2@122.393,71.908 129.997,71.908 v1(132.287,69.618) 132.348,69.557 134.003,69.557 R2.2 142.189,69.495 143.209,68.475 ; U3.14 122.889,41.663 125.926,44.7 169.3,44.7 ; J3.1 133.303,57.426 v1(133.303,62.506) 133.239,62.57 133.239,64.852 R1.2 ; C1.1 139.397,65.433 139.397,66.466 139.363,66.5 141.234,66.5 143.209,68.475 ; U1.10@139.405,68.078 139.405,68.554 139.453,68.602 140.963,68.602 141.09,68.475 143.209,68.475 ; R3.1 153.588,72.976 149.087,68.475 ; R6.1 R8.1 158.888,71.788 155.575,68.475 149.087,68.475 ; 109.5,39.9 109.5,33.985 113.491,29.994 167.834,29.994 J5.2 173.5,35.66 173.5,40.5 169.3,44.7 ; 109.5,39.9 109.5,42.059 ; 143.209,68.475 145.525,68.475 ; 145.525,68.475 169.3,44.7 ; 145.525,68.475 149.087,68.475
  Bottom Layer w0.254: v1(132.287,69.618) 132.287,64.586 133.303,63.57 v1(133.303,62.506)
pads on no net: J1.A5 J1.B5 J1.S1 J1.S2 J1.S3 J1.S4 J5.3 J5.4 S2.4 S2.5 S2.6 S2.7 U1.3 U1.5 U1.6 U1.8 U1.11 U2.2 U2.3 U2.5 U2.9 U2.10 U2.20 U2.21 U2.23 U2.24 U2.25 U2.26

## Polygon pours and split planes (outlines as drawn)
GND on Bottom Layer "NONET_L-01_P-001" (solid, pour order 0): 52.8,25.4 177.8,25.4 177.8,80.5 52.8,80.5